# EAGLE board panel (EAGLE 7.0.0)
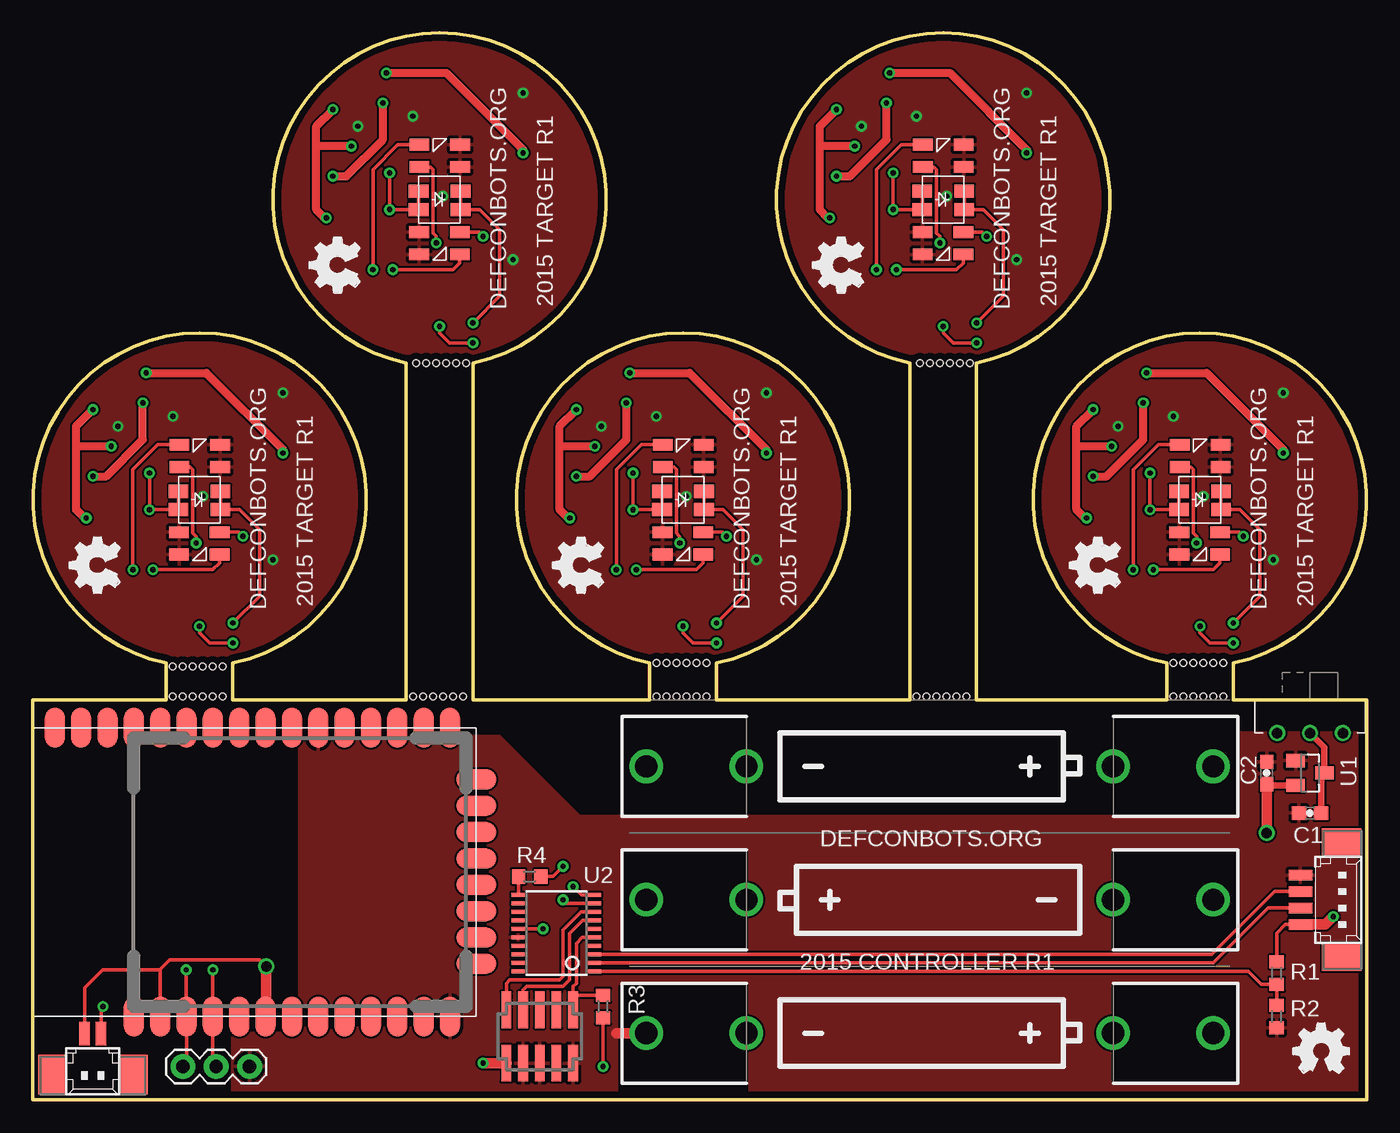
[diagram p0: board, top side]
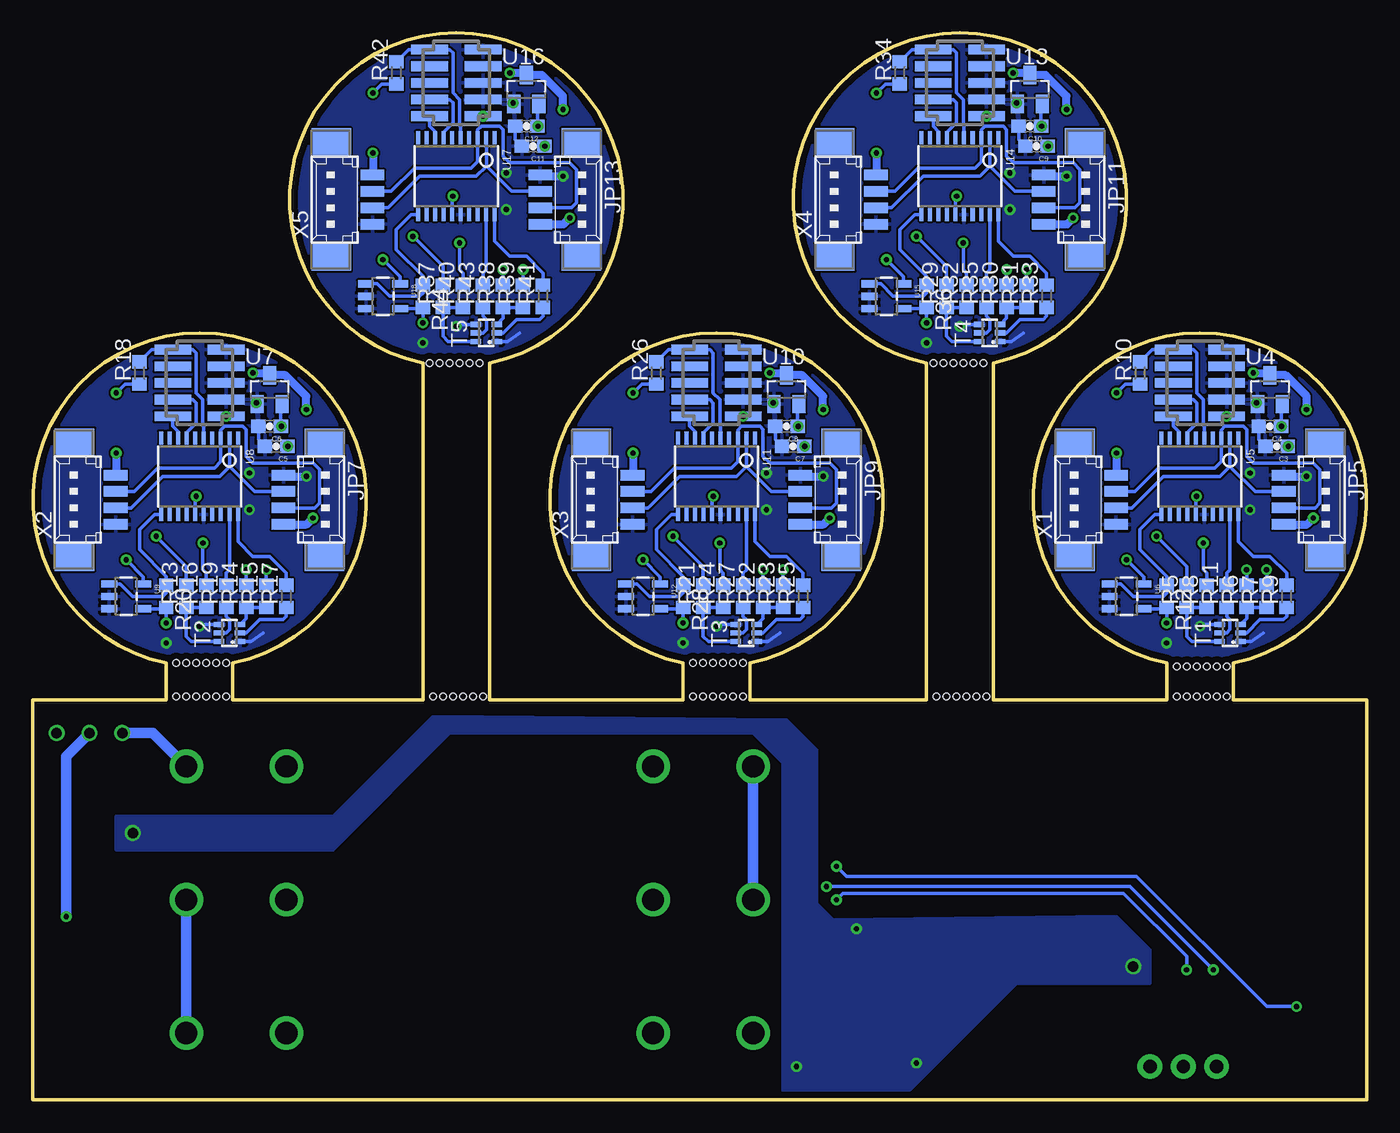
[diagram p1: board, bottom side, seen from below]

Size 101.6 x 81.28 mm. Coordinates in mm from the lower left corner, seen from the top.
Outline: 0,0 101.6,0 101.6,30.48 91.44,30.48 91.44,33.27 arc337 86.36,33.27 86.36,30.48 71.88,30.48 71.88,56.13 arc337 66.8,56.13 66.8,30.48 52.07,30.48 52.07,33.27 arc337 46.99,33.27 46.99,30.48 33.53,30.48 33.53,56.13 arc337 28.45,56.13 28.45,30.48 15.24,30.48 15.24,33.27 arc337 10.16,33.27 10.16,30.48 0,30.48 0,0
Copper layers (1*16): Top 0.0178mm / dielectric 59mil / Bottom 0.0178mm
Design rules "SSC-EAGLE-2Lyr_v1.0.0.3": minimum track width 6mil, minimum drill 14mil, track to track 6mil, track to pad 6mil, pad to pad 6mil, via to via 6mil, smd to smd 6mil, copper to edge 20mil, drill to drill 16mil, minimum pad ring 8mil, minimum via ring 8mil, stop-mask expansion 3mil, vias tented up to drill 0mil, thermal gap 10mil
Net classes: 1 PWR: width 0.254 mm, drill 0.406 mm
Holes 0.51 mm at 10.67,30.73 11.43,30.73 12.19,30.73 12.95,30.73 13.72,30.73 14.48,30.73 10.67,33.02 11.43,33.02 12.19,33.02 12.95,33.02 13.72,33.02 14.48,33.02 28.96,30.73 29.72,30.73 30.48,30.73 31.24,30.73 32,30.73 32.77,30.73 47.5,30.73 48.26,30.73 49.02,30.73 49.78,30.73 50.55,30.73 51.31,30.73 29.21,56.13 29.97,56.13 30.73,56.13 31.5,56.13 32.26,56.13 33.02,56.13 67.31,30.73 68.07,30.73 68.83,30.73 69.6,30.73 70.36,30.73 71.12,30.73 67.56,56.13 68.33,56.13 69.09,56.13 69.85,56.13 70.61,56.13 71.37,56.13 86.87,30.73 87.63,30.73 88.39,30.73 89.15,30.73 89.92,30.73 90.68,30.73 86.87,33.27 87.63,33.27 88.39,33.27 89.15,33.27 89.92,33.27 90.68,33.27 47.5,33.27 48.26,33.27 49.02,33.27 49.78,33.27 50.55,33.27 51.31,33.27

## Footprints (pad centres in the part's own frame; a part is rotated, then mirrored left to right if it is on the bottom)
BATTERY-AAA-KIT = drill 1.702: GND@1 21.59,0; GND@2 13.97,0; PWR@1 -21.59,0; PWR@2 -13.97,0
0603-CAP = smd 1.1 x 1: 1 -0.85,0; 2 0.85,0
150141RB = smd 1.5 x 0.9: 1 3.85,2.15; 2 3.85,0.45; 3 0.75,2.15; 4 0.75,0.45
CLS15 = smd 1.5 x 1: 1 0,0; 2 0,1.4; 3 3.2,1.4; 4 3.2,0
FTSH-105-01-XXX-DV-K = smd 0.737 x 2.794: 1 -2.54,-2.032; 2 -2.54,2.032; 3 -1.27,-2.032; 4 -1.27,2.032; 5 0,-2.032; 6 0,2.032; 7 1.27,-2.032; 8 1.27,2.032; 9 2.54,-2.032; 10 2.54,2.032
53398-02 = smd 0.8 x 1.8: 1 0.625,-2.5; 2 -0.625,-2.5 | smd 2.1 x 3: S1 3.125,0.625; S2 -3.125,0.625
53398-04 = smd 0.8 x 1.8: 1 1.875,-2.5; 2 0.625,-2.5; 3 -0.625,-2.5; 4 -1.875,-2.5 | smd 2.1 x 3: S1 4.375,0.625; S2 -4.375,0.625
1X03 = drill 1.016 pad 1.88: 1 0,0; 2 2.54,0; 3 5.08,0
R0603 = smd 1 x 1.1: 1 -0.85,0; 2 0.85,0
EG1270 = drill 0.8: P$1 0,2.5; P$2 0,0; P$3 0,-2.5
SOT363_PHILIPS = smd 0.4 x 0.8: 1 -0.65,-0.8; 2 0,-0.8; 3 0.65,-0.8; 4 0.65,0.8; 5 0,0.8; 6 -0.65,0.8
SOT23 = smd 1 x 1.4: 1 -0.95,-1.1; 2 0.95,-1.1; 3 0,1.1
TSSOP20 = smd 0.305 x 0.991: 1 -2.925,-2.918; 2 -2.275,-2.918; 3 -1.625,-2.918; 4 -0.975,-2.918; 5 -0.325,-2.918; 6 0.325,-2.918; 7 0.975,-2.918; 8 1.625,-2.918; 9 2.275,-2.918; 10 2.925,-2.918; 11 2.925,2.918; 12 2.275,2.918; 13 1.625,2.918; 14 0.975,2.918; 15 0.325,2.918; 16 -0.325,2.918; 17 -0.975,2.918; 18 -1.625,2.918; 19 -2.275,2.918; 20 -2.925,2.918
XBEE-SMT = smd 3.048 x 1.524: 1 0,26.086; 2 0,24.079; 3 0,22.073; 4 0,20.066; 5 0,18.059; 6 0,16.053; 7 0,14.046; 8 0,12.04; 9 0,10.033; 10 0,8.026; 11 0,6.02; 12 0,4.013; 13 0,2.007; 22 21.996,2.007; 23 21.996,4.013; 24 21.996,6.02; 25 21.996,8.026; 26 21.996,10.033; 27 21.996,12.04; 28 21.996,14.046; 29 21.996,16.053; 30 21.996,18.059; 31 21.996,20.066; 32 21.996,22.073; 33 21.996,24.079; 34 21.996,26.086; 35 21.996,28.092; 36 21.996,30.099; 37 21.996,32.106 | smd 1.524 x 3.048: 14 4.013,0; 15 6.02,0; 16 8.026,0; 17 10.033,0; 18 12.04,0; 19 14.046,0; 20 16.053,0; 21 18.059,0
SOT23-5 = smd 0.55 x 1.2: 1 -0.95,-1.3; 2 0,-1.3; 3 0.95,-1.3; 4 0.95,1.3; 5 -0.95,1.3

## Placement (x,y rotation side)
BAT1  534-082  [BATTERY-AAA-KIT]  68.33,25.4 180 top
BAT2  534-082  [BATTERY-AAA-KIT]  68.33,15.24 0 top
BAT3  534-082  [BATTERY-AAA-KIT]  68.33,5.08 180 top
C1  C1608X5R1C106M080AB  [0603-CAP]  97.28,21.84 180 top
C2  C1608X5R1C106M080AB  [0603-CAP]  93.98,24.89 90 top
C3  C1608X5R1C106M080AB  [0603-CAP]  6.86,49.78 180 bottom
C4  C1608X5R1C106M080AB  [0603-CAP]  7.37,51.31 180 bottom
C5  C1608X5R1C106M080AB  [0603-CAP]  83.06,49.78 180 bottom
C6  C1608X5R1C106M080AB  [0603-CAP]  83.57,51.31 180 bottom
C7  C1608X5R1C106M080AB  [0603-CAP]  43.69,49.78 180 bottom
C8  C1608X5R1C106M080AB  [0603-CAP]  44.2,51.31 180 bottom
C9  C1608X5R1C106M080AB  [0603-CAP]  25.15,72.64 180 bottom
C10  C1608X5R1C106M080AB  [0603-CAP]  25.65,74.17 180 bottom
C11  C1608X5R1C106M080AB  [0603-CAP]  63.5,72.64 180 bottom
C12  C1608X5R1C106M080AB  [0603-CAP]  64.01,74.17 180 bottom
D1  150141RB73100  [150141RB]  14.99,43.69 180 top
D2  150141RB73100  [150141RB]  10.41,47.75 0 top
D3  638-CLS1522CL213GTR8  [CLS15]  11.1,44.96 0 top
D4  150141RB73100  [150141RB]  91.19,43.69 180 top
D5  150141RB73100  [150141RB]  86.61,47.75 0 top
D6  638-CLS1522CL213GTR8  [CLS15]  87.3,44.96 0 top
D7  150141RB73100  [150141RB]  51.82,43.69 180 top
D8  150141RB73100  [150141RB]  47.24,47.75 0 top
D9  638-CLS1522CL213GTR8  [CLS15]  47.93,44.96 0 top
D10  150141RB73100  [150141RB]  33.27,66.55 180 top
D11  150141RB73100  [150141RB]  28.7,70.61 0 top
D12  638-CLS1522CL213GTR8  [CLS15]  29.39,67.82 0 top
D13  150141RB73100  [150141RB]  71.63,66.55 180 top
D14  150141RB73100  [150141RB]  67.06,70.61 0 top
D15  638-CLS1522CL213GTR8  [CLS15]  67.74,67.82 0 top
JP1  FTSH-105-01-L  [FTSH-105-01-XXX-DV-K]  38.61,4.83 0 top
JP2  798-DF132P125V20  [53398-02]  4.57,2.54 180 top
JP3  798-DF134P125V20  [53398-04]  99.06,15.24 270 top
JP4  [1X03]  11.43,2.54 0 top
JP5  798-DF134P125V20  [53398-04]  3.81,45.72 270 bottom
JP6  FTSH-105-01-L  [FTSH-105-01-XXX-DV-K]  12.7,54.61 90 bottom
JP7  798-DF134P125V20  [53398-04]  80.01,45.72 270 bottom
JP8  FTSH-105-01-L  [FTSH-105-01-XXX-DV-K]  88.9,54.61 90 bottom
JP9  798-DF134P125V20  [53398-04]  40.64,45.72 270 bottom
JP10  FTSH-105-01-L  [FTSH-105-01-XXX-DV-K]  49.53,54.61 90 bottom
JP11  798-DF134P125V20  [53398-04]  22.1,68.58 270 bottom
JP12  FTSH-105-01-L  [FTSH-105-01-XXX-DV-K]  30.99,77.47 90 bottom
JP13  798-DF134P125V20  [53398-04]  60.45,68.58 270 bottom
JP14  FTSH-105-01-L  [FTSH-105-01-XXX-DV-K]  69.34,77.47 90 bottom
LOGO1  OSHW_LOGO_FILLX0150-NT  [OSHW_FILLX150_NOTEXT]  96.01,2.03 0 top
LOGO2  OSHW_LOGO_FILLX0150-NT  [OSHW_FILLX150_NOTEXT]  6.6,38.61 90 top
LOGO3  OSHW_LOGO_FILLX0150-NT  [OSHW_FILLX150_NOTEXT]  82.8,38.61 90 top
LOGO4  OSHW_LOGO_FILLX0150-NT  [OSHW_FILLX150_NOTEXT]  43.43,38.61 90 top
LOGO5  OSHW_LOGO_FILLX0150-NT  [OSHW_FILLX150_NOTEXT]  24.89,61.47 90 top
LOGO6  OSHW_LOGO_FILLX0150-NT  [OSHW_FILLX150_NOTEXT]  63.25,61.47 90 top
R1  71-CRCW0603-10K-E3  [R0603]  94.74,9.65 90 top
R2  71-CRCW0603-10K-E3  [R0603]  94.74,6.35 90 top
R3  71-CRCW0603-10K-E3  [R0603]  43.43,7.11 90 top
R4  71-CRCW0603220RFKEB  [R0603]  37.85,17.02 0 top
R5  71-CRCW0603-5.6-E3  [R0603]  13.72,38.35 90 bottom
R6  71-CRCW060368R0FKEB  [R0603]  9.14,38.35 90 bottom
R7  71-CRCW060368R0FKEB  [R0603]  7.62,38.35 90 bottom
R8  71-CRCW0603-5.6-E3  [R0603]  12.19,38.35 90 bottom
R9  71-CRCW0603220RFKEB  [R0603]  6.1,38.35 90 bottom
R10  71-CRCW0603-10K-E3  [R0603]  17.27,55.37 90 bottom
R11  71-CRCW0603220RFKEB  [R0603]  10.67,38.35 90 bottom
R12  71-CRCW06034M64FKEA  [R0603]  15.24,38.35 270 bottom
R13  71-CRCW0603-5.6-E3  [R0603]  89.92,38.35 90 bottom
R14  71-CRCW060368R0FKEB  [R0603]  85.34,38.35 90 bottom
R15  71-CRCW060368R0FKEB  [R0603]  83.82,38.35 90 bottom
R16  71-CRCW0603-5.6-E3  [R0603]  88.39,38.35 90 bottom
R17  71-CRCW0603220RFKEB  [R0603]  82.3,38.35 90 bottom
R18  71-CRCW0603-10K-E3  [R0603]  93.47,55.37 90 bottom
R19  71-CRCW0603220RFKEB  [R0603]  86.87,38.35 90 bottom
R20  71-CRCW06034M64FKEA  [R0603]  91.44,38.35 270 bottom
R21  71-CRCW0603-5.6-E3  [R0603]  50.55,38.35 90 bottom
R22  71-CRCW060368R0FKEB  [R0603]  45.97,38.35 90 bottom
R23  71-CRCW060368R0FKEB  [R0603]  44.45,38.35 90 bottom
R24  71-CRCW0603-5.6-E3  [R0603]  49.02,38.35 90 bottom
R25  71-CRCW0603220RFKEB  [R0603]  42.93,38.35 90 bottom
R26  71-CRCW0603-10K-E3  [R0603]  54.1,55.37 90 bottom
R27  71-CRCW0603220RFKEB  [R0603]  47.5,38.35 90 bottom
R28  71-CRCW06034M64FKEA  [R0603]  52.07,38.35 270 bottom
R29  71-CRCW0603-5.6-E3  [R0603]  32,61.21 90 bottom
R30  71-CRCW060368R0FKEB  [R0603]  27.43,61.21 90 bottom
R31  71-CRCW060368R0FKEB  [R0603]  25.91,61.21 90 bottom
R32  71-CRCW0603-5.6-E3  [R0603]  30.48,61.21 90 bottom
R33  71-CRCW0603220RFKEB  [R0603]  24.38,61.21 90 bottom
R34  71-CRCW0603-10K-E3  [R0603]  35.56,78.23 90 bottom
R35  71-CRCW0603220RFKEB  [R0603]  28.96,61.21 90 bottom
R36  71-CRCW06034M64FKEA  [R0603]  33.53,61.21 270 bottom
R37  71-CRCW0603-5.6-E3  [R0603]  70.36,61.21 90 bottom
R38  71-CRCW060368R0FKEB  [R0603]  65.79,61.21 90 bottom
R39  71-CRCW060368R0FKEB  [R0603]  64.26,61.21 90 bottom
R40  71-CRCW0603-5.6-E3  [R0603]  68.83,61.21 90 bottom
R41  71-CRCW0603220RFKEB  [R0603]  62.74,61.21 90 bottom
R42  71-CRCW0603-10K-E3  [R0603]  73.91,78.23 90 bottom
R43  71-CRCW0603220RFKEB  [R0603]  67.31,61.21 90 bottom
R44  71-CRCW06034M64FKEA  [R0603]  71.88,61.21 270 bottom
S1  612-EG1270  [EG1270]  97.28,27.94 90 top
T1  771-BC847BS-T/R  [SOT363_PHILIPS]  10.41,35.56 90 bottom
T2  771-BC847BS-T/R  [SOT363_PHILIPS]  86.61,35.56 90 bottom
T3  771-BC847BS-T/R  [SOT363_PHILIPS]  47.24,35.56 90 bottom
T4  771-BC847BS-T/R  [SOT363_PHILIPS]  28.7,58.42 90 bottom
T5  771-BC847BS-T/R  [SOT363_PHILIPS]  67.06,58.42 90 bottom
U1  579-MCP1703T-3002ECB  [SOT23]  97.28,24.89 270 top
U2  771-LPC824M201JDH20J  [TSSOP20]  39.88,12.7 90 top
U3  888-XB24CZ7PIS-004  [XBEE-SMT]  33.78,6.35 90 top
U4  579-MCP1703T-3002ECB  [SOT23]  7.37,54.1 0 bottom
U5  771-LPC824M201JDH20J  [TSSOP20]  12.7,47.5 180 bottom
U6  579-MCP6291T-E/OT  [SOT23-5]  18.29,38.35 270 bottom
U7  579-MCP1703T-3002ECB  [SOT23]  83.57,54.1 0 bottom
U8  771-LPC824M201JDH20J  [TSSOP20]  88.9,47.5 180 bottom
U9  579-MCP6291T-E/OT  [SOT23-5]  94.49,38.35 270 bottom
U10  579-MCP1703T-3002ECB  [SOT23]  44.2,54.1 0 bottom
U11  771-LPC824M201JDH20J  [TSSOP20]  49.53,47.5 180 bottom
U12  579-MCP6291T-E/OT  [SOT23-5]  55.12,38.35 270 bottom
U13  579-MCP1703T-3002ECB  [SOT23]  25.65,76.96 0 bottom
U14  771-LPC824M201JDH20J  [TSSOP20]  30.99,70.36 180 bottom
U15  579-MCP6291T-E/OT  [SOT23-5]  36.58,61.21 270 bottom
U16  579-MCP1703T-3002ECB  [SOT23]  64.01,76.96 0 bottom
U17  771-LPC824M201JDH20J  [TSSOP20]  69.34,70.36 180 bottom
U18  579-MCP6291T-E/OT  [SOT23-5]  74.93,61.21 270 bottom
X1  798-DF134P125V20  [53398-04]  21.59,45.72 90 bottom
X2  798-DF134P125V20  [53398-04]  97.79,45.72 90 bottom
X3  798-DF134P125V20  [53398-04]  58.42,45.72 90 bottom
X4  798-DF134P125V20  [53398-04]  39.88,68.58 90 bottom
X5  798-DF134P125V20  [53398-04]  78.23,68.58 90 bottom

## Library data of the parts
BAT1-BAT3 = SparkFun-Electromechanical; PROD_ID: BATT-08571
C1-C12 = SparkFun-Passives
D1-D15 JP1 JP6 JP8 JP10 JP12 JP14 S1 U2 U5 U8 U11 U14 U17 = torpedo
JP2 = con-molex; OC_FARNELL: unknown; OC_NEWARK: unknown
JP3 JP5 JP7 JP9 JP11 JP13 X1-X5 = con-molex; OC_FARNELL: 1125367; OC_NEWARK: unknown
JP4 = SparkFun-Connectors
LOGO1-LOGO6 = ohw-logo
R1-R44 = rcl
T1-T5 = transistor-small-signal
U1 U4 U7 U10 U13 U16 = linear
U3 = xbee
U6 U9 U12 U15 U18 = SparkFun-AnalogIC; PROD_ID: IC-11991

## Nets
+3V1: C4.1 D1.1 D1.2 D2.1 D2.2 JP6.1 R10.1 U4.2 U5.15 U6.5
+3V2: C6.1 D4.1 D4.2 D5.1 D5.2 JP8.1 R18.1 U7.2 U8.15 U9.5
+3V3: C2.1 JP1.1 JP2.1 R3.1 U1.2 U2.15 U3.2 U3.6
+3V4: C8.1 D7.1 D7.2 D8.1 D8.2 JP10.1 R26.1 U10.2 U11.15 U12.5
+3V5: C10.1 D10.1 D10.2 D11.1 D11.2 JP12.1 R34.1 U13.2 U14.15 U15.5
+3V6: C12.1 D13.1 D13.2 D14.1 D14.2 JP14.1 R42.1 U16.2 U17.15 U18.5
BLUE_LED: R9.2 U5.20
BLUE_LED1: R17.2 U8.20
BLUE_LED2: R25.2 U11.20
BLUE_LED3: R33.2 U14.20
BLUE_LED4: R41.2 U17.20
GND: BAT3.GND@1 C1.2 C2.2 JP1.3 JP1.5 JP1.9 JP3.4 JP4.3 R2.1 U1.1 U2.16 U3.13 U3.27
GND1: C3.2 C4.2 D3.1 D3.2 JP5.4 JP6.3 JP6.5 JP6.9 T1.1 T1.4 U4.1 U5.16 U6.2 U6.3 X1.4
GND2: C5.2 C6.2 D6.1 D6.2 JP7.4 JP8.3 JP8.5 JP8.9 T2.1 T2.4 U7.1 U8.16 U9.2 U9.3 X2.4
GND3: C7.2 C8.2 D9.1 D9.2 JP9.4 JP10.3 JP10.5 JP10.9 T3.1 T3.4 U10.1 U11.16 U12.2 U12.3 X3.4
GND4: C9.2 C10.2 D12.1 D12.2 JP11.4 JP12.3 JP12.5 JP12.9 T4.1 T4.4 U13.1 U14.16 U15.2 U15.3 X4.4
GND5: C11.2 C12.2 D15.1 D15.2 JP13.4 JP14.3 JP14.5 JP14.9 T5.1 T5.4 U16.1 U17.16 U18.2 U18.3 X5.4
IR: R4.1 U2.11
LASER_RX: R12.1 U5.11 U6.1
LASER_RX1: R20.1 U8.11 U9.1
LASER_RX2: R28.1 U11.11 U12.1
LASER_RX3: R36.1 U14.11 U15.1
LASER_RX4: R44.1 U17.11 U18.1
N$1: BAT2.GND@1 BAT3.PWR@1
N$2: BAT1.GND@1 BAT2.PWR@1
N$3: BAT1.PWR@1 S1.P$1
N$4: JP2.2 R4.2
N$5: D3.3 D3.4 R12.2 U6.4
N$6: R9.1 T1.2
N$7: R6.1 R7.1 T1.3
N$8: D1.3 R6.2
N$9: D2.3 R7.2
N$10: D1.4 R5.2
N$11: R11.1 T1.5
N$12: D2.4 R8.2
N$13: R5.1 R8.1 T1.6
N$14: D6.3 D6.4 R20.2 U9.4
N$15: R17.1 T2.2
N$16: R19.1 T2.5
N$17: R14.1 R15.1 T2.3
N$18: D4.3 R14.2
N$19: D5.3 R15.2
N$20: D4.4 R13.2
N$21: D5.4 R16.2
N$22: R13.1 R16.1 T2.6
N$23: D9.3 D9.4 R28.2 U12.4
N$24: R25.1 T3.2
N$25: R27.1 T3.5
N$26: R22.1 R23.1 T3.3
N$27: D7.3 R22.2
N$28: D8.3 R23.2
N$29: D7.4 R21.2
N$30: D8.4 R24.2
N$31: R21.1 R24.1 T3.6
N$32: D12.3 D12.4 R36.2 U15.4
N$33: R33.1 T4.2
N$34: R35.1 T4.5
N$35: R30.1 R31.1 T4.3
N$36: D10.3 R30.2
N$37: D11.3 R31.2
N$38: D10.4 R29.2
N$39: D11.4 R32.2
N$40: R29.1 R32.1 T4.6
N$41: D15.3 D15.4 R44.2 U18.4
N$42: R41.1 T5.2
N$43: R43.1 T5.5
N$44: R38.1 R39.1 T5.3
N$45: D13.3 R38.2
N$46: D14.3 R39.2
N$47: D13.4 R37.2
N$48: D14.4 R40.2
N$49: R37.1 R40.1 T5.6
RED_LED: R11.2 U5.19
RED_LED1: R19.2 U8.19
RED_LED2: R27.2 U11.19
RED_LED3: R35.2 U14.19
RED_LED4: R43.2 U17.19
RF_RX: JP4.1 U2.10 U3.3
RF_TX: JP4.2 U2.9 U3.4
RST: JP1.10 R3.2 U2.5
RST1: JP6.10 R10.2 U5.5
RST2: JP8.10 R18.2 U8.5
RST3: JP10.10 R26.2 U11.5
RST4: JP12.10 R34.2 U14.5
RST5: JP14.10 R42.2 U17.5
RX: JP3.3 U2.3
RX1: JP5.3 U5.2 X1.3
RX2: JP7.3 U8.2 X2.3
RX3: JP9.3 U11.2 X3.3
RX4: JP11.3 U14.2 X4.3
RX5: JP13.3 U17.2 X5.3
SWCLK: JP1.4 U2.7
SWCLK1: JP6.4 U5.7
SWCLK2: JP8.4 U8.7
SWCLK3: JP10.4 U11.7
SWCLK4: JP12.4 U14.7
SWCLK5: JP14.4 U17.7
SWDIO: JP1.2 U2.8
SWDIO1: JP6.2 U5.8
SWDIO2: JP8.2 U8.8
SWDIO3: JP10.2 U11.8
SWDIO4: JP12.2 U14.8
SWDIO5: JP14.2 U17.8
TX: JP3.2 U2.2
TX1: JP5.2 U5.3 X1.2
TX2: JP7.2 U8.3 X2.2
TX3: JP9.2 U11.3 X3.2
TX4: JP11.2 U14.3 X4.2
TX5: JP13.2 U17.3 X5.2
VBAT: R1.1 R2.2 U2.1
VIN: C1.1 JP3.1 R1.2 S1.P$2 U1.3
VIN1: C3.1 JP5.1 U4.3 X1.1
VIN2: C5.1 JP7.1 U7.3 X2.1
VIN3: C7.1 JP9.1 U10.3 X3.1
VIN4: C9.1 JP11.1 U13.3 X4.1
VIN5: C11.1 JP13.1 U16.3 X5.1

## Tracks (layer width: path | path; a pad name or v marks a point on that pad's centre or on a via)
+3V1  (via drill 0.41)
  Bottom 0.254: U4.2 6.52,52.9 C4.1 arc-180 v6.48,51.31 | R10.1 18.38,54.52 v19.05,53.85 | U5.15 13.03,45.9 v12.95,45.97 | U6.5 16.99,39.85 v18.29,41.15
  other vias: 10.67,52.07
  pour Top: 0,33.78 0,58.42 25.4,58.42 25.4,33.78
+3V2  (via drill 0.41)
  Bottom 0.254: U7.2 82.72,52.9 C6.1 arc-180 v82.68,51.31 | R18.1 94.58,54.52 v95.25,53.85 | U8.15 89.22,45.9 v89.15,45.97 | U9.5 93.19,39.85 v94.49,41.15
  other vias: 86.87,52.07
  pour Top: 76.2,33.78 76.2,58.42 101.6,58.42 101.6,33.78
+3V3  (via drill 0.41, 0.81)
  Top 0.254: U2.15 v38.86,13.03 | U3.2 9.7,9.65 9.7,9.91 | 9.7,9.91 9.7,9.96 10.41,10.67 17.27,10.67 v17.78,10.16 | R3.1 v43.43,2.54 | JP2.1 3.95,8.52 5.33,9.91 9.7,9.91
  Top 0.508: U1.2 94.08,23.94 C2.1 | U3.6 17.78,6.4
  Top 0.813: 17.78,6.4 v17.78,10.16 | C2.1 v93.98,20.32 | JP1.1 v34.29,2.79
  pour Bottom: 16.51,11.43 19.05,13.97 40.64,13.72 41.91,14.99 41.91,26.67 44.2,28.96 71.12,29.21 78.74,21.59 95.25,21.59 95.25,19.05 78.74,19.05 69.85,27.94 46.74,27.94 44.45,25.65 44.45,0 35.56,0 26.67,8.89 16.51,8.89
+3V4  (via drill 0.41)
  Bottom 0.254: U10.2 43.35,52.9 C8.1 arc-180 v43.31,51.31 | R26.1 55.21,54.52 v55.88,53.85 | U11.15 49.85,45.9 v49.78,45.97 | U12.5 53.82,39.85 v55.12,41.15
  other vias: 47.5,52.07
  pour Top: 37.08,33.78 36.83,58.42 62.23,58.42 62.48,33.78
+3V5  (via drill 0.41)
  Bottom 0.254: U13.2 24.8,75.76 C10.1 arc-180 v24.77,74.17 | R34.1 36.66,77.38 v37.34,76.71 | U14.15 31.31,68.76 v31.24,68.83 | U15.5 35.28,62.71 v36.58,64.01
  other vias: 28.96,74.93
  pour Top: 18.29,56.64 18.29,81.28 43.69,81.28 43.69,56.64
+3V6  (via drill 0.41)
  Bottom 0.254: U16.2 63.16,75.76 C12.1 arc-180 v63.12,74.17 | R42.1 75.02,77.38 v75.69,76.71 | U17.15 69.67,68.76 v69.6,68.83 | U18.5 73.63,62.71 v74.93,64.01
  other vias: 67.31,74.93
  pour Top: 56.64,56.64 56.64,81.28 82.04,81.28 82.04,56.64
BLUE_LED
  Bottom 0.254: U5.20 9.78,42.54 8.64,41.4 7.37,41.4 6.1,40.13 R9.2
BLUE_LED1
  Bottom 0.254: U8.20 85.97,42.54 84.84,41.4 83.57,41.4 82.3,40.13 R17.2
BLUE_LED2
  Bottom 0.254: U11.20 46.6,42.54 45.47,41.4 44.2,41.4 42.93,40.13 R25.2
BLUE_LED3
  Bottom 0.254: U14.20 28.06,65.4 26.92,64.26 25.65,64.26 24.38,62.99 R33.2
BLUE_LED4
  Bottom 0.254: U17.20 66.42,65.4 65.28,64.26 64.01,64.26 62.74,62.99 R41.2
GND
  Top 0.813: BAT3.GND@1 44.45,5.08
  pour Top: 20.32,27.69 35.56,27.69 41.66,21.59 91.44,21.59 91.44,27.94 101.6,27.94 101.6,-2.54 54.61,-2.54 54.61,8.89 44.45,8.89 44.45,-2.54 15.24,-2.54 15.24,5.08 20.32,5.08
GND1  (via drill 0.41)
  Top 0.254: D3.2 D3.1 v8.89,44.96 v8.89,47.75 | v12.7,36.07 12.7,35.56 13.46,34.8 v15.24,34.8
  Top 0.61: v8.38,53.09 8.38,50.29 5.59,47.5 v4.57,47.5
  Bottom 0.254: U4.1 8.22,52.9 | T1.1 8.78,34.91 7.87,35.56 | T1.4 12.59,36.21 v12.7,36.07 | 6.1,47.5 JP5.4 | C3.2 8.22,50.29 C4.2
  Bottom 0.61: 6.1,47.5 v4.57,47.5
  pour Bottom: 25.4,33.78 0,33.78 0,58.42 25.4,58.42
GND2  (via drill 0.41)
  Top 0.254: D6.2 D6.1 v85.09,44.96 v85.09,47.75 | v88.9,36.07 88.9,35.56 89.66,34.8 v91.44,34.8
  Top 0.61: v84.58,53.09 84.58,50.29 81.79,47.5 v80.77,47.5
  Bottom 0.254: U7.1 84.42,52.9 | T2.1 84.98,34.91 84.07,35.56 | T2.4 88.79,36.21 v88.9,36.07 | 82.3,47.5 JP7.4 | C5.2 84.42,50.29 C6.2
  Bottom 0.61: 82.3,47.5 v80.77,47.5
  pour Bottom: 101.6,33.78 76.2,33.78 76.2,58.42 101.6,58.42
GND3  (via drill 0.41)
  Top 0.254: D9.2 D9.1 v45.72,44.96 v45.72,47.75 | v49.53,36.07 49.53,35.56 50.29,34.8 v52.07,34.8
  Top 0.61: v45.21,53.09 45.21,50.29 42.42,47.5 v41.4,47.5
  Bottom 0.254: U10.1 45.05,52.9 | T3.1 45.61,34.91 44.7,35.56 | T3.4 49.42,36.21 v49.53,36.07 | 42.93,47.5 JP9.4 | C7.2 45.05,50.29 C8.2
  Bottom 0.61: 42.93,47.5 v41.4,47.5
  pour Bottom: 62.48,33.78 37.08,33.78 36.83,58.42 62.23,58.42
GND4  (via drill 0.41)
  Top 0.254: D12.2 D12.1 v27.18,67.82 v27.18,70.61 | v30.99,58.93 30.99,58.42 31.75,57.66 v33.53,57.66
  Top 0.61: v26.67,75.95 26.67,73.15 23.88,70.36 v22.86,70.36
  Bottom 0.254: U13.1 26.5,75.76 | T4.1 27.07,57.77 26.16,58.42 | T4.4 30.88,59.07 v30.99,58.93 | 24.38,70.36 JP11.4 | C9.2 26.5,73.15 C10.2
  Bottom 0.61: 24.38,70.36 v22.86,70.36
  pour Bottom: 43.69,56.64 18.29,56.64 18.29,81.28 43.69,81.28
GND5  (via drill 0.41)
  Top 0.254: D15.2 D15.1 v65.53,67.82 v65.53,70.61 | v69.34,58.93 69.34,58.42 70.1,57.66 v71.88,57.66
  Top 0.61: v65.02,75.95 65.02,73.15 62.23,70.36 v61.21,70.36
  Bottom 0.254: U16.1 64.86,75.76 | T5.1 65.42,57.77 64.52,58.42 | T5.4 69.23,59.07 v69.34,58.93 | 62.74,70.36 JP13.4 | C11.2 64.86,73.15 C12.2
  Bottom 0.61: 62.74,70.36 v61.21,70.36
  pour Bottom: 82.04,56.64 56.64,56.64 56.64,81.28 82.04,81.28
IR
  Top 0.254: U2.11 37,15.62 R4.1
LASER_RX
  Bottom 0.254: U6.1 18.73,39.3 17.78,38.35 15.49,38.35 15.24,38.61 R12.1 15.24,39.88 17.27,41.91 17.27,43.43 16.13,44.58 U5.11
LASER_RX1
  Bottom 0.254: U9.1 94.93,39.3 93.98,38.35 91.69,38.35 91.44,38.61 R20.1 91.44,39.88 93.47,41.91 93.47,43.43 92.33,44.58 U8.11
LASER_RX2
  Bottom 0.254: U12.1 55.56,39.3 54.61,38.35 52.32,38.35 52.07,38.61 R28.1 52.07,39.88 54.1,41.91 54.1,43.43 52.96,44.58 U11.11
LASER_RX3
  Bottom 0.254: U15.1 37.02,62.16 36.07,61.21 33.78,61.21 33.53,61.47 R36.1 33.53,62.74 35.56,64.77 35.56,66.29 34.41,67.44 U14.11
LASER_RX4
  Bottom 0.254: U18.1 75.37,62.16 74.42,61.21 72.14,61.21 71.88,61.47 R44.1 71.88,62.74 73.91,64.77 73.91,66.29 72.77,67.44 U17.11
N$1
  Bottom 0.813: BAT2.GND@1 BAT3.PWR@1
N$2
  Bottom 0.813: BAT2.PWR@1 BAT1.GND@1
N$3
  Bottom 0.813: BAT1.PWR@1 92.46,27.94 S1.P$1
N$4  (via drill 0.41)
  Top 0.254: R4.2 39.62,17.02 v40.39,17.78 | v5.33,7.11 5.2,6.97 JP2.2
  Bottom 0.254: v40.39,17.78 39.62,17.02 17.53,17.02 7.62,7.11 v5.33,7.11
N$5  (via drill 0.41)
  Top 0.254: D3.3 D3.4 15.75,44.96 17.27,43.43 17.27,38.35 v15.24,36.32
  Bottom 0.254: U6.4 15.34,37.4 R12.2 v15.24,36.32
N$6
  Bottom 0.254: T1.2 9.14,35.56 8.13,36.58 6.35,36.58 6.1,36.83 R9.1
N$7
  Bottom 0.254: R7.1 R6.1 9.14,36.68 T1.3
N$8  (via drill 0.41)
  Top 0.254: D1.3 14.22,41.53 14.22,40.89 13.72,40.39 v9.14,40.39
  Bottom 0.254: R6.2 v9.14,40.39
N$9  (via drill 0.41)
  Top 0.254: v7.62,40.39 7.62,48.01 9.52,49.9 D2.3
  Bottom 0.254: R7.2 v7.62,40.39
N$10  (via drill 0.41)
  Top 0.254: v16,42.93 15.69,43.24 D1.4
  Bottom 0.254: R5.2 13.72,40.64 v16,42.93
N$11
  Bottom 0.254: R11.1 10.67,36.83 10.41,36.58 10.41,35.81 10.67,35.56 T1.5
N$12  (via drill 0.41)
  Top 0.254: D2.4 12,48.2 12.19,48.01 12.19,43.18 12.45,42.93 v12.45,42.42
  Bottom 0.254: v12.45,42.42 12.45,40.39 12.19,40.13 R8.2
N$13
  Bottom 0.254: R8.1 R5.1 13.72,35.31 13.32,34.91 T1.6
N$14  (via drill 0.41)
  Top 0.254: D6.3 D6.4 91.95,44.96 93.47,43.43 93.47,38.35 v91.44,36.32
  Bottom 0.254: U9.4 91.54,37.4 R20.2 v91.44,36.32
N$15
  Bottom 0.254: T2.2 85.34,35.56 84.33,36.58 82.55,36.58 82.3,36.83 R17.1
N$16
  Bottom 0.254: R19.1 86.87,36.83 86.61,36.58 86.61,35.81 86.87,35.56 T2.5
N$17
  Bottom 0.254: R15.1 R14.1 85.34,36.68 T2.3
N$18  (via drill 0.41)
  Top 0.254: D4.3 90.42,41.53 90.42,40.89 89.92,40.39 v85.34,40.39
  Bottom 0.254: R14.2 v85.34,40.39
N$19  (via drill 0.41)
  Top 0.254: v83.82,40.39 83.82,48.01 85.72,49.9 D5.3
  Bottom 0.254: R15.2 v83.82,40.39
N$20  (via drill 0.41)
  Top 0.254: v92.2,42.93 91.89,43.24 D4.4
  Bottom 0.254: R13.2 89.92,40.64 v92.2,42.93
N$21  (via drill 0.41)
  Top 0.254: D5.4 88.2,48.2 88.39,48.01 88.39,43.18 88.65,42.93 v88.65,42.42
  Bottom 0.254: v88.65,42.42 88.65,40.39 88.39,40.13 R16.2
N$22
  Bottom 0.254: R16.1 R13.1 89.92,35.31 89.52,34.91 T2.6
N$23  (via drill 0.41)
  Top 0.254: D9.3 D9.4 52.58,44.96 54.1,43.43 54.1,38.35 v52.07,36.32
  Bottom 0.254: U12.4 52.17,37.4 R28.2 v52.07,36.32
N$24
  Bottom 0.254: T3.2 45.97,35.56 44.96,36.58 43.18,36.58 42.93,36.83 R25.1
N$25
  Bottom 0.254: R27.1 47.5,36.83 47.24,36.58 47.24,35.81 47.5,35.56 T3.5
N$26
  Bottom 0.254: R23.1 R22.1 45.97,36.68 T3.3
N$27  (via drill 0.41)
  Top 0.254: D7.3 51.05,41.53 51.05,40.89 50.55,40.39 v45.97,40.39
  Bottom 0.254: R22.2 v45.97,40.39
N$28  (via drill 0.41)
  Top 0.254: v44.45,40.39 44.45,48.01 46.35,49.9 D8.3
  Bottom 0.254: R23.2 v44.45,40.39
N$29  (via drill 0.41)
  Top 0.254: v52.83,42.93 52.52,43.24 D7.4
  Bottom 0.254: R21.2 50.55,40.64 v52.83,42.93
N$30  (via drill 0.41)
  Top 0.254: D8.4 48.83,48.2 49.02,48.01 49.02,43.18 49.28,42.93 v49.28,42.42
  Bottom 0.254: v49.28,42.42 49.28,40.39 49.02,40.13 R24.2
N$31
  Bottom 0.254: R24.1 R21.1 50.55,35.31 50.15,34.91 T3.6
N$32  (via drill 0.41)
  Top 0.254: D12.3 D12.4 34.04,67.82 35.56,66.29 35.56,61.21 v33.53,59.18
  Bottom 0.254: U15.4 33.63,60.26 R36.2 v33.53,59.18
N$33
  Bottom 0.254: T4.2 27.43,58.42 26.42,59.44 24.64,59.44 24.38,59.69 R33.1
N$34
  Bottom 0.254: R35.1 28.96,59.69 28.7,59.44 28.7,58.67 28.96,58.42 T4.5
N$35
  Bottom 0.254: R31.1 R30.1 27.43,59.54 T4.3
N$36  (via drill 0.41)
  Top 0.254: D10.3 32.51,64.39 32.51,63.75 32,63.25 v27.43,63.25
  Bottom 0.254: R30.2 v27.43,63.25
N$37  (via drill 0.41)
  Top 0.254: v25.91,63.25 25.91,70.87 27.8,72.76 D11.3
  Bottom 0.254: R31.2 v25.91,63.25
N$38  (via drill 0.41)
  Top 0.254: v34.29,65.79 33.98,66.1 D10.4
  Bottom 0.254: R29.2 32,63.5 v34.29,65.79
N$39  (via drill 0.41)
  Top 0.254: D11.4 30.28,71.06 30.48,70.87 30.48,66.04 30.73,65.79 v30.73,65.28
  Bottom 0.254: v30.73,65.28 30.73,63.25 30.48,62.99 R32.2
N$40
  Bottom 0.254: R32.1 R29.1 32,58.17 31.61,57.77 T4.6
N$41  (via drill 0.41)
  Top 0.254: D15.3 D15.4 72.39,67.82 73.91,66.29 73.91,61.21 v71.88,59.18
  Bottom 0.254: U18.4 71.98,60.26 R44.2 v71.88,59.18
N$42
  Bottom 0.254: T5.2 65.79,58.42 64.77,59.44 62.99,59.44 62.74,59.69 R41.1
N$43
  Bottom 0.254: R43.1 67.31,59.69 67.06,59.44 67.06,58.67 67.31,58.42 T5.5
N$44
  Bottom 0.254: R39.1 R38.1 65.79,59.54 T5.3
N$45  (via drill 0.41)
  Top 0.254: D13.3 70.87,64.39 70.87,63.75 70.36,63.25 v65.79,63.25
  Bottom 0.254: R38.2 v65.79,63.25
N$46  (via drill 0.41)
  Top 0.254: v64.26,63.25 64.26,70.87 66.16,72.76 D14.3
  Bottom 0.254: R39.2 v64.26,63.25
N$47  (via drill 0.41)
  Top 0.254: v72.64,65.79 72.33,66.1 D13.4
  Bottom 0.254: R37.2 70.36,63.5 v72.64,65.79
N$48  (via drill 0.41)
  Top 0.254: D14.4 68.64,71.06 68.83,70.87 68.83,66.04 69.09,65.79 v69.09,65.28
  Bottom 0.254: v69.09,65.28 69.09,63.25 68.83,62.99 R40.2
N$49
  Bottom 0.254: R40.1 R37.1 70.36,58.17 69.96,57.77 T5.6
RED_LED
  Bottom 0.254: U5.19 10.43,40.38 10.67,40.13 R11.2
RED_LED1
  Bottom 0.254: U8.19 86.62,40.38 86.87,40.13 R19.2
RED_LED2
  Bottom 0.254: U11.19 47.26,40.38 47.5,40.13 R27.2
RED_LED3
  Bottom 0.254: U14.19 28.71,63.23 28.96,62.99 R35.2
RED_LED4
  Bottom 0.254: U17.19 67.07,63.23 67.31,62.99 R43.2
RF_RX  (via drill 0.41)
  Top 0.254: v41.15,16.26 41.78,15.62 U2.10 | v11.68,9.91 11.68,6.38 U3.3 11.71,2.82 JP4.1
  Bottom 0.254: v41.15,16.26 18.03,16.26 v11.68,9.91
RF_TX  (via drill 0.41)
  Top 0.254: v40.39,15.24 40.65,14.97 U2.9 | v13.72,9.91 U3.4 13.72,2.79 JP4.2
  Bottom 0.254: v40.39,15.24 39.88,15.75 18.54,15.75 13.72,10.92 v13.72,9.91
RST
  Top 0.254: JP1.10 41.15,7.87 41.15,7.96 | 41.15,7.96 41.15,8.64 41.4,8.89 41.4,11.94 41.84,12.38 U2.5 | R3.2 41.15,7.96
RST1
  Bottom 0.254: R10.2 16.34,57.15 JP6.10 13.21,57.15 12.95,56.9 12.95,53.85 12.45,53.34 12.45,51.44 12.38,51.24 U5.5
RST2
  Bottom 0.254: R18.2 92.54,57.15 JP8.10 89.41,57.15 89.15,56.9 89.15,53.85 88.65,53.34 88.65,51.44 88.58,51.24 U8.5
RST3
  Bottom 0.254: R26.2 53.17,57.15 JP10.10 50.04,57.15 49.78,56.9 49.78,53.85 49.28,53.34 49.28,51.44 49.2,51.24 U11.5
RST4
  Bottom 0.254: R34.2 34.63,80.01 JP12.10 31.5,80.01 31.24,79.76 31.24,76.71 30.73,76.2 30.73,74.3 30.66,74.1 U14.5
RST5
  Bottom 0.254: R42.2 72.99,80.01 JP14.10 69.85,80.01 69.6,79.76 69.6,76.71 69.09,76.2 69.09,74.3 69.02,74.1 U17.5
RX
  Top 0.254: JP3.3 94.61,15.87 89.81,11.07 U2.3
RX1
  Bottom 0.254: JP5.3 8.5,46.34 10.41,48.26 | 10.41,48.26 10.41,50.41 U5.2 | X1.3 17.9,45.09 15.49,47.5 11.18,47.5 10.41,48.26
RX2
  Bottom 0.254: JP7.3 84.7,46.34 86.61,48.26 | 86.61,48.26 86.61,50.41 U8.2 | X2.3 94.1,45.09 91.69,47.5 87.38,47.5 86.61,48.26
RX3
  Bottom 0.254: JP9.3 45.33,46.34 47.24,48.26 | 47.24,48.26 47.24,50.41 U11.2 | X3.3 54.73,45.09 52.32,47.5 48.01,47.5 47.24,48.26
RX4
  Bottom 0.254: JP11.3 26.79,69.2 28.7,71.12 | 28.7,71.12 28.7,73.27 U14.2 | X4.3 36.19,67.95 33.78,70.36 29.46,70.36 28.7,71.12
RX5
  Bottom 0.254: JP13.3 65.14,69.2 67.06,71.12 | 67.06,71.12 67.06,73.27 U17.2 | X5.3 74.54,67.95 72.14,70.36 67.82,70.36 67.06,71.12
SWCLK
  Top 0.254: U2.7 41.87,13.68 40.89,12.7 40.89,9.14 40.39,8.64 37.59,8.64 37.34,8.38 JP1.4
SWCLK1
  Bottom 0.254: JP6.4 13.21,53.34 12.95,53.09 12.95,51.56 13.68,50.84 U5.7
SWCLK2
  Bottom 0.254: JP8.4 89.41,53.34 89.15,53.09 89.15,51.56 89.88,50.84 U8.7
SWCLK3
  Bottom 0.254: JP10.4 50.04,53.34 49.78,53.09 49.78,51.56 50.51,50.84 U11.7
SWCLK4
  Bottom 0.254: JP12.4 31.5,76.2 31.24,75.95 31.24,74.42 31.96,73.7 U14.7
SWCLK5
  Bottom 0.254: JP14.4 69.85,76.2 69.6,75.95 69.6,74.42 70.32,73.7 U17.7
SWDIO
  Top 0.254: U2.8 41.76,14.32 40.39,12.95 40.39,9.4 40.13,9.14 36.32,9.14 36.07,8.89 JP1.2
SWDIO1
  Bottom 0.254: U5.8 14.32,50.9 14.73,51.31 JP6.2
SWDIO2
  Bottom 0.254: U8.8 90.53,50.9 90.93,51.31 JP8.2
SWDIO3
  Bottom 0.254: U11.8 51.16,50.9 51.56,51.31 JP10.2
SWDIO4
  Bottom 0.254: U14.8 32.61,73.76 33.02,74.17 JP12.2
SWDIO5
  Bottom 0.254: U17.8 70.97,73.76 71.37,74.17 JP14.2
TX
  Top 0.254: JP3.2 94.12,14.62 89.93,10.43 U2.2
TX1
  Bottom 0.254: JP5.2 3.93,45.09 3.56,45.47 3.56,48.01 4.06,48.51 8.64,48.51 9.14,49.02 9.14,51.05 9.4,51.31 10.79,51.31 11.07,51.03 U5.3 11.07,48.62 11.57,48.12 15.88,48.12 17.66,46.34 X1.2
TX2
  Bottom 0.254: JP7.2 80.13,45.09 79.76,45.47 79.76,48.01 80.26,48.51 84.84,48.51 85.34,49.02 85.34,51.05 85.6,51.31 87,51.31 87.28,51.03 U8.3 87.28,48.62 87.77,48.12 92.08,48.12 93.86,46.34 X2.2
TX3
  Bottom 0.254: JP9.2 40.76,45.09 40.39,45.47 40.39,48.01 40.89,48.51 45.47,48.51 45.97,49.02 45.97,51.05 46.23,51.31 47.62,51.31 47.91,51.03 U11.3 47.91,48.62 48.4,48.12 52.72,48.12 54.49,46.34 X3.2
TX4
  Bottom 0.254: JP11.2 22.21,67.95 21.84,68.33 21.84,70.87 22.35,71.37 26.92,71.37 27.43,71.88 27.43,73.91 27.69,74.17 29.08,74.17 29.36,73.89 U14.3 29.36,71.47 29.86,70.98 34.17,70.98 35.95,69.2 X4.2
TX5
  Bottom 0.254: JP13.2 60.57,67.95 60.2,68.33 60.2,70.87 60.71,71.37 65.28,71.37 65.79,71.88 65.79,73.91 66.04,74.17 67.44,74.17 67.72,73.89 U17.3 67.72,71.47 68.21,70.98 72.53,70.98 74.31,69.2 X5.2
VBAT
  Top 0.254: R2.2 R1.1 93.56,8.8 92.59,9.78 U2.1
VIN  (via drill 0.41)
  Top 0.254: R1.2 94.74,12.7 95.41,13.37 JP3.1
  Top 0.508: S1.P$2 98.38,26.84 U1.3 98.13,24.64 C1.1
  Top 0.813: JP3.1 98.45,13.37 v99.06,13.97
  Bottom 0.813: v99.06,13.97 99.06,26.16 S1.P$2
VIN1  (via drill 0.41)
  Top 0.254: v4.06,44.32 3.94,44.32 | 19.09,49.32 v19.05,49.28
  Top 0.61: 3.94,44.32 3.3,44.96 3.3,49.78 | 3.3,49.78 3.3,51.31 v4.57,52.58 | v8.64,55.37 13.21,55.37 19.09,49.49 19.09,49.32 | v5.97,49.78 3.3,49.78
  Bottom 0.254: 7.37,55.37 U4.3 | 19.05,47.75 X1.1 19.05,47.63 | C3.1 v5.97,49.78
  Bottom 0.61: JP5.1 4.54,43.84 v4.06,44.32 | v4.57,52.58 4.57,53.59 6.18,55.2 U4.3 | v8.64,55.37 7.37,55.37 | v19.05,49.28 19.05,47.63
VIN2  (via drill 0.41)
  Top 0.254: v80.26,44.32 80.14,44.32 | 95.29,49.32 v95.25,49.28
  Top 0.61: 80.14,44.32 79.5,44.96 79.5,49.78 | 79.5,49.78 79.5,51.31 v80.77,52.58 | v84.84,55.37 89.41,55.37 95.29,49.49 95.29,49.32 | v82.17,49.78 79.5,49.78
  Bottom 0.254: 83.57,55.37 U7.3 | 95.25,47.75 X2.1 95.25,47.63 | C5.1 v82.17,49.78
  Bottom 0.61: JP7.1 80.74,43.84 v80.26,44.32 | v80.77,52.58 80.77,53.59 82.38,55.2 U7.3 | v84.84,55.37 83.57,55.37 | v95.25,49.28 95.25,47.63
VIN3  (via drill 0.41)
  Top 0.254: v40.89,44.32 40.77,44.32 | 55.92,49.32 v55.88,49.28
  Top 0.61: 40.77,44.32 40.13,44.96 40.13,49.78 | 40.13,49.78 40.13,51.31 v41.4,52.58 | v45.47,55.37 50.04,55.37 55.92,49.49 55.92,49.32 | v42.8,49.78 40.13,49.78
  Bottom 0.254: 44.2,55.37 U10.3 | 55.88,47.75 X3.1 55.88,47.63 | C7.1 v42.8,49.78
  Bottom 0.61: JP9.1 41.37,43.84 v40.89,44.32 | v41.4,52.58 41.4,53.59 43.01,55.2 U10.3 | v45.47,55.37 44.2,55.37 | v55.88,49.28 55.88,47.63
VIN4  (via drill 0.41)
  Top 0.254: v22.35,67.18 22.23,67.18 | 37.38,72.18 v37.34,72.14
  Top 0.61: 22.23,67.18 21.59,67.82 21.59,72.64 | 21.59,72.64 21.59,74.17 v22.86,75.44 | v26.92,78.23 31.5,78.23 37.38,72.35 37.38,72.18 | v24.26,72.64 21.59,72.64
  Bottom 0.254: 25.65,78.23 U13.3 | 37.34,70.61 X4.1 37.34,70.5 | C9.1 v24.26,72.64
  Bottom 0.61: JP11.1 22.83,66.7 v22.35,67.18 | v22.86,75.44 22.86,76.45 24.47,78.06 U13.3 | v26.92,78.23 25.65,78.23 | v37.34,72.14 37.34,70.5
VIN5  (via drill 0.41)
  Top 0.254: v60.71,67.18 60.58,67.18 | 75.73,72.18 v75.69,72.14
  Top 0.61: 60.58,67.18 59.94,67.82 59.94,72.64 | 59.94,72.64 59.94,74.17 v61.21,75.44 | v65.28,78.23 69.85,78.23 75.73,72.35 75.73,72.18 | v62.61,72.64 59.94,72.64
  Bottom 0.254: 64.01,78.23 U16.3 | 75.69,70.61 X5.1 75.69,70.5 | C11.1 v62.61,72.64
  Bottom 0.61: JP13.1 61.18,66.7 v60.71,67.18 | v61.21,75.44 61.21,76.45 62.82,78.06 U16.3 | v65.28,78.23 64.01,78.23 | v75.69,72.14 75.69,70.5

## Text on the board
tPlace: DEFCONBOTS.ORG | 2015 TARGET R1 | DEFCONBOTS.ORG | 2015 TARGET R1 | 2015 TARGET R1 | 2015 TARGET R1 | 2015 TARGET R1 | DEFCONBOTS.ORG | DEFCONBOTS.ORG | DEFCONBOTS.ORG | DEFCONBOTS.ORG | 2015 CONTROLLER R1